# EAGLE board 20180513_Frontboard (EAGLE 9.0.1)
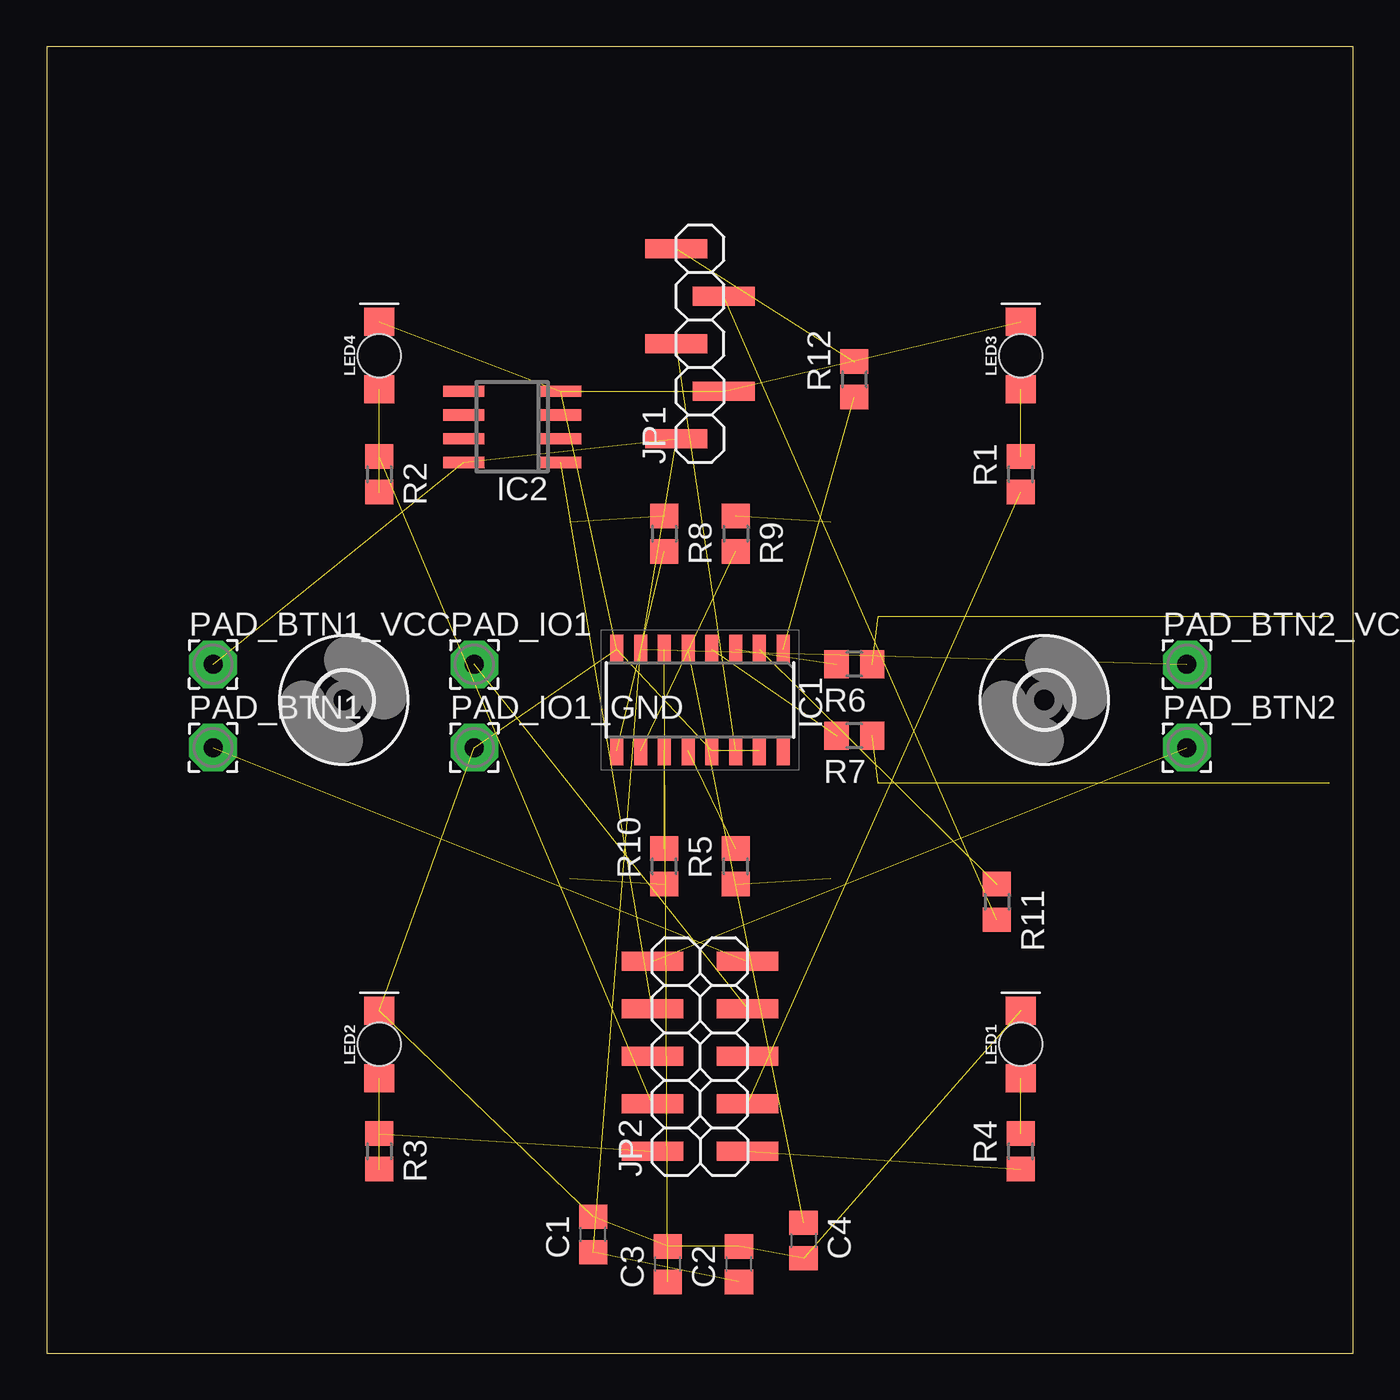
[diagram p0: board, top side]
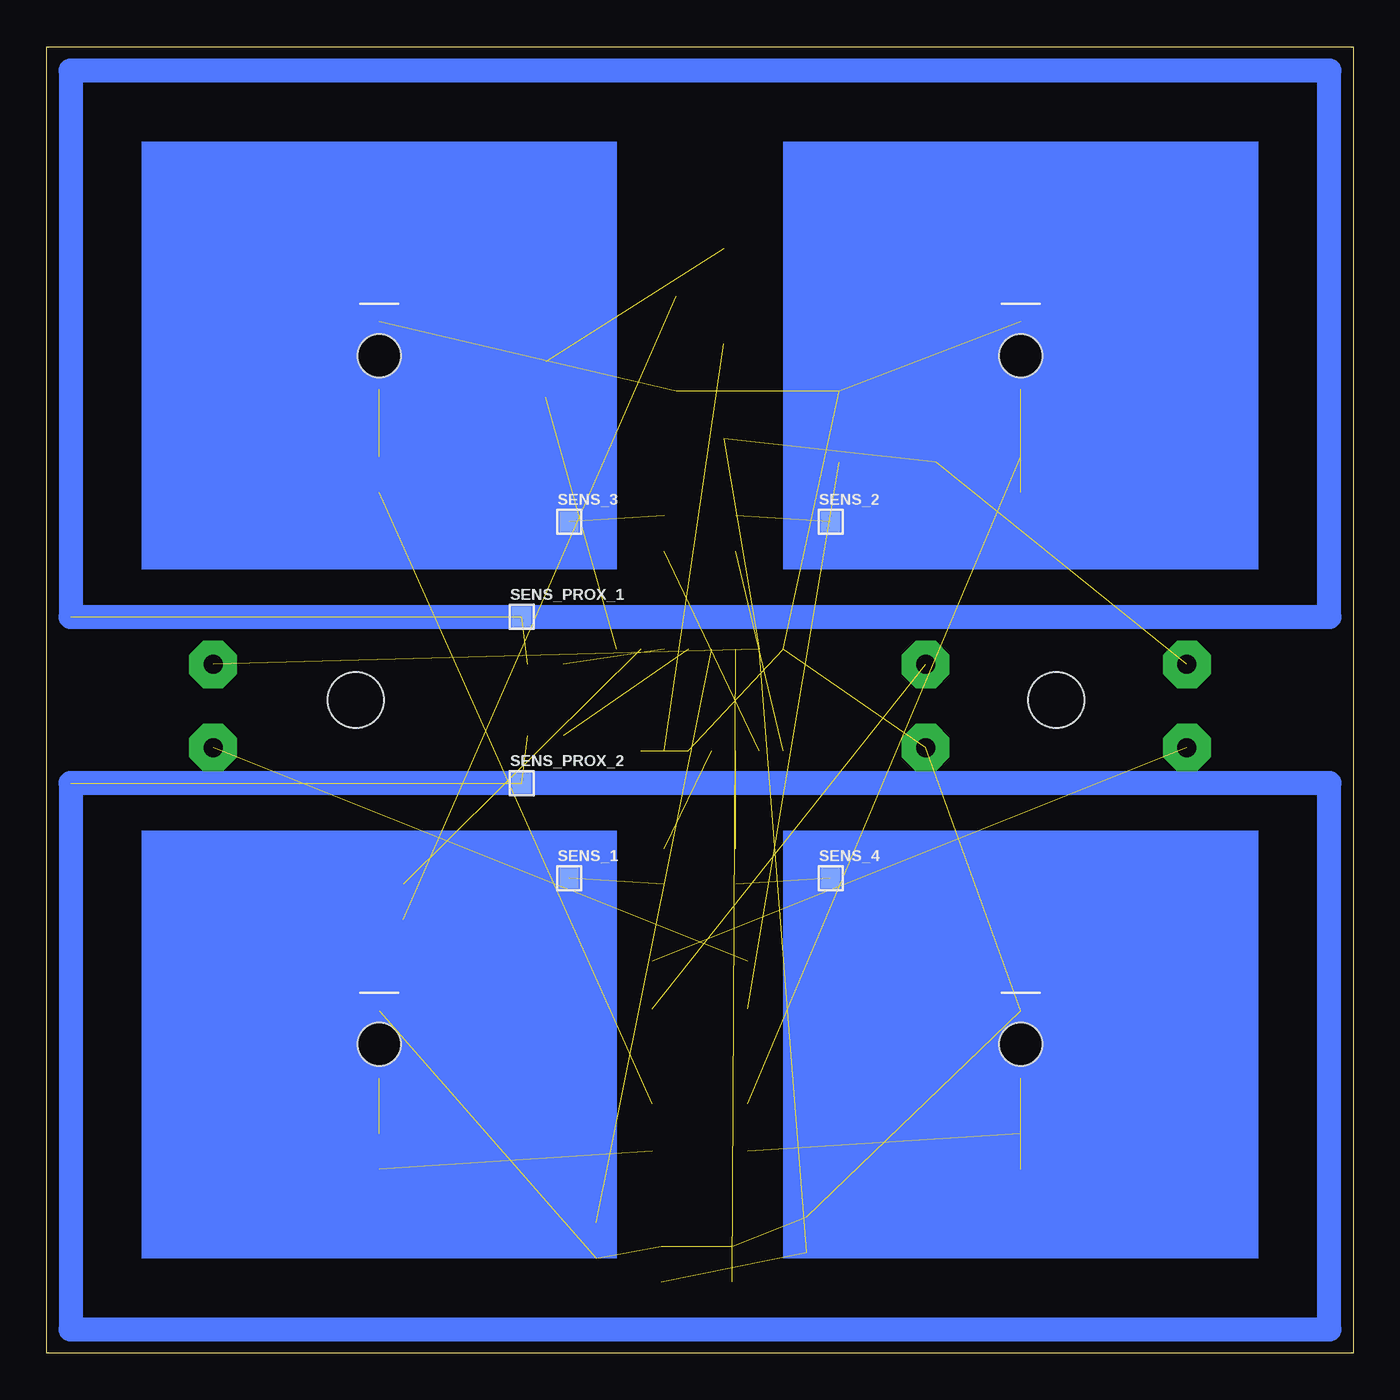
[diagram p1: board, bottom side, seen from below]

Size 69.85 x 69.85 mm. Coordinates in mm from the lower left corner, seen from the top.
Outline: 0,0 69.85,0 69.85,69.85 0,69.85 0,0
Copper layers (1*16): Top 0.035mm / dielectric 1.5mm / Bottom 0.035mm
Design rules "default": minimum track width 6mil, minimum drill 0.35mm, track to track 6mil, track to pad 6mil, pad to pad 6mil, via to via 6mil, smd to smd 6mil, copper to edge 40mil, drill to drill 6mil, minimum pad ring 10mil, minimum via ring 8mil, stop-mask expansion 4mil, vias tented up to drill 0mil, thermal gap 10mil
Net classes: 0 default: width 0.203 mm

## Footprints (pad centres in the part's own frame; a part is rotated, then mirrored left to right if it is on the bottom)
C0805 = smd 1.3 x 1.5: 1 -0.95,0; 2 0.95,0
SOIC127P600X173-16N = smd 1.6 x 0.69: 1 -2.7,4.445; 2 -2.7,3.175; 3 -2.7,1.905; 4 -2.7,0.635; 5 -2.7,-0.635; 6 -2.7,-1.905; 7 -2.7,-3.175; 8 -2.7,-4.445; 9 2.7,-4.445; 10 2.7,-3.175; 11 2.7,-1.905; 12 2.7,-0.635; 13 2.7,0.635; 14 2.7,1.905; 15 2.7,3.175; 16 2.7,4.445
SO08 = smd 0.6 x 2.2: 1 -1.905,-2.6; 2 -0.635,-2.6; 3 0.635,-2.6; 4 1.905,-2.6; 5 1.905,2.6; 6 0.635,2.6; 7 -0.635,2.6; 8 -1.905,2.6
1X05SMD = smd 1.016 x 3.302: 1 -1.27,1.27; 2 1.27,-1.27; 3 3.81,1.27; 4 6.35,-1.27; 5 8.89,1.27
2X05SMD = smd 1.016 x 3.302: 1 -1.27,-3.81; 2 -1.27,1.27; 3 1.27,-3.81; 4 1.27,1.27; 5 3.81,-3.81; 6 3.81,1.27; 7 6.35,-3.81; 8 6.35,1.27; 9 8.89,-3.81; 10 8.89,1.27
LED-1206-BOTTOM = smd 1.5 x 1.6: A -1.8,0; C 1.8,0 | hole 2.3: 0,0
2,54/1,0 = drill 1.016 pad 2.54 octagon: 1 0,0
R0805 = smd 1.3 x 1.5: 1 -0.95,0; 2 0.95,0
WPAD-1-0603 = smd 1 x 1.1: 1 -0.015,0
3,0 = hole 3: 0,0

## Placement (x,y rotation side)
C1  0.1uf  [C0805]  29.21,6.35 90 top
C2  1uf  [C0805]  37.01,4.76 90 top
C3  0.1uf  [C0805]  33.2,4.76 90 top
C4  2.2nf  [C0805]  40.46,6.03 270 top
IC1  CY8CMBR3110-SX2I  [SOIC127P600X173-16N]  34.92,34.92 270 top
IC2  LM35DM  [SO08]  24.89,49.53 90 top
JP1  I2C  [1X05SMD]  34.92,50.16 90 top
JP2  IOS  [2X05SMD]  33.66,12.06 90 top
LED1  WHITE  [LED-1206-BOTTOM]  52.07,16.51 90 top
LED2  WHITE  [LED-1206-BOTTOM]  17.78,16.51 90 top
LED3  WHITE  [LED-1206-BOTTOM]  52.07,53.34 90 top
LED4  WHITE  [LED-1206-BOTTOM]  17.78,53.34 90 top
PAD_BTN1  BTN1  [2,54/1,0]  8.89,32.38 0 top
PAD_BTN1_VCC  BTN1  [2,54/1,0]  8.89,36.83 0 top
PAD_BTN2  BTN2  [2,54/1,0]  60.96,32.38 0 top
PAD_BTN2_VCC  BTN2  [2,54/1,0]  60.96,36.83 0 top
PAD_IO1  IO1  [2,54/1,0]  22.86,36.83 0 top
PAD_IO1_GND  IO1  [2,54/1,0]  22.86,32.38 0 top
R1  330E  [R0805]  52.07,46.99 90 top
R2  330E  [R0805]  17.78,46.99 270 top
R3  330E  [R0805]  17.78,10.79 270 top
R4  330E  [R0805]  52.07,10.79 90 top
R5  560E  [R0805]  36.83,26.04 90 top
R6  560E  [R0805]  43.18,36.83 180 top
R7  560E  [R0805]  43.18,33.02 180 top
R8  560E  [R0805]  33.02,43.81 270 top
R9  560E  [R0805]  36.83,43.81 270 top
R10  560E  [R0805]  33.02,26.04 90 top
R11  330E  [R0805]  50.8,24.13 270 top
R12  330E  [R0805]  43.18,52.07 90 top
SENS_1  SENS_1  [WPAD-1-0603]  41.91,25.4 0 bottom
SENS_2  SENS_2  [WPAD-1-0603]  27.94,44.45 0 bottom
SENS_3  SENS_3  [WPAD-1-0603]  41.91,44.45 0 bottom
SENS_4  SENS_4  [WPAD-1-0603]  27.94,25.4 0 bottom
SENS_PROX_1  SENS_PROX  [WPAD-1-0603]  44.45,39.37 0 bottom
SENS_PROX_2  SENS_PROX  [WPAD-1-0603]  44.45,30.48 0 bottom
U$1  [3,0]  15.88,34.92 0 top
U$2  [3,0]  53.34,34.92 0 top

## Library data of the parts
C1-C4 = rcl; SPICEPREFIX: C
IC1 = CY8CMBR3110-SX2I; ARROW_PART_NUMBER: CY8CMBR3110-SX2I; ARROW_PRICE/STOCK: https://www.arrow.com/en/products/cy8cmbr3110-sx2i/cypress-semiconductor; DESCRIPTION: CY8CMBR3xxx; HEIGHT: mm; MANUFACTURER_NAME: Cypress Semiconductor; MANUFACTURER_PART_NUMBER: CY8CMBR3110-SX2I; RS_PART_NUMBER: 1242975P; RS_PRICE/STOCK: http://uk.rs-online.com/web/p/products/1242975P
IC2 = lm35 (2)
JP1 JP2 = pinhead
LED1-LED4 = SparkFun-LED
PAD_BTN1 PAD_BTN1_VCC PAD_BTN2 PAD_BTN2_VCC PAD_IO1 PAD_IO1_GND = wirepad
R1-R12 = resistor
SENS_1-SENS_4 SENS_PROX_1 SENS_PROX_2 = PatternAgents-ProtoPads; BOM: EXCLUDE
U$1 U$2 = holes

## Nets
BTN1: JP2.9 PAD_BTN1.1
BTN2: JP2.10 PAD_BTN2.1
GND: C1.2 C2.2 C3.2 C4.2 IC1.8 IC1.13 IC1.15 IC2.4 JP1.2 LED1.C LED2.C LED3.C LED4.C PAD_IO1_GND.1
HOST_INT: IC1.14 JP1.3
I2C_SCL: JP1.4 R11.2
I2C_SDA: JP1.5 R12.2
IO1: JP2.7 PAD_IO1.1
LED1: JP2.1 R4.1
LED2: JP2.2 R3.1
LED3: JP2.3 R1.1
LED4: JP2.4 R2.1
N$2: IC1.9 R8.2
N$3: IC1.10 R9.2
N$4: IC1.11 R10.2
N$5: IC1.1 R12.1
N$6: IC1.2 R11.1
N$7: IC1.3 R6.2
N$8: IC1.12 R5.2
N$9: C3.1 IC1.6
N$10: C4.1 IC1.5
N$11: IC1.4 R7.2
N$14: LED4.A R2.2
N$15: LED1.A R4.2
N$16: LED2.A R3.2
N$17: LED3.A R1.2
SENS_1: R5.1 SENS_1.1
SENS_2: R8.1 SENS_2.1
SENS_3: R9.1 SENS_3.1
SENS_4: R10.1 SENS_4.1
SENS_PROX_1: R6.1 SENS_PROX_1.1
SENS_PROX_2: R7.1 SENS_PROX_2.1
TMP: IC2.1 JP2.8
VCC: C1.1 C2.1 IC1.7 IC2.8 JP1.1 PAD_BTN1_VCC.1 PAD_BTN2_VCC.1

## Tracks (layer width: path | path; a pad name or v marks a point on that pad's centre or on a via)
BTN1  (1 unrouted)
BTN2  (1 unrouted)
GND  (13 unrouted)
HOST_INT  (1 unrouted)
I2C_SCL  (1 unrouted)
I2C_SDA  (1 unrouted)
IO1  (1 unrouted)
LED1  (1 unrouted)
LED2  (1 unrouted)
LED3  (1 unrouted)
LED4  (1 unrouted)
N$2  (1 unrouted)
N$3  (1 unrouted)
N$4  (1 unrouted)
N$5  (1 unrouted)
N$6  (1 unrouted)
N$7  (1 unrouted)
N$8  (1 unrouted)
N$9  (1 unrouted)
N$10  (1 unrouted)
N$11  (1 unrouted)
N$14  (1 unrouted)
N$15  (1 unrouted)
N$16  (1 unrouted)
N$17  (1 unrouted)
SENS_1  (1 unrouted)
SENS_2  (1 unrouted)
SENS_3  (1 unrouted)
SENS_4  (1 unrouted)
SENS_PROX_1  (2 unrouted)
  Bottom 1.27: 1.27,68.58 68.58,68.58 68.58,39.37 1.27,39.37 1.27,68.58
SENS_PROX_2  (2 unrouted)
  Bottom 1.27: 68.58,1.27 1.27,1.27 1.27,30.48 68.58,30.48 68.58,1.27
TMP  (1 unrouted)
VCC  (6 unrouted)
(copper drawn outside any net)
  shapes: Bottom area x4